# Altium PCB ADXL001.PcbDoc
Units mm, origin at the board's own origin, x right, y up, seen from the top; angles counter-clockwise.
Board outline 20 x 22.95 mm, 2 copper layers (Top Layer, Bottom Layer); 5 components, 5 nets, 22 pads, 5 vias.
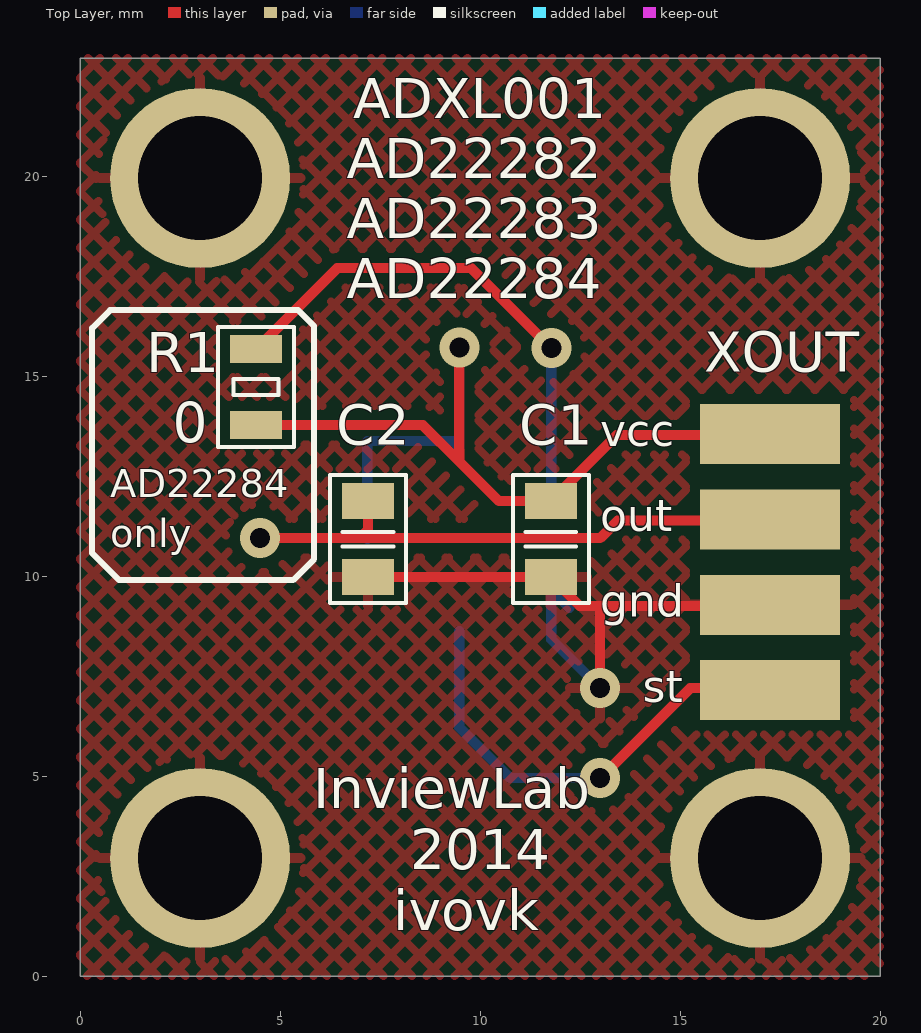
[diagram p0: Top Layer view]
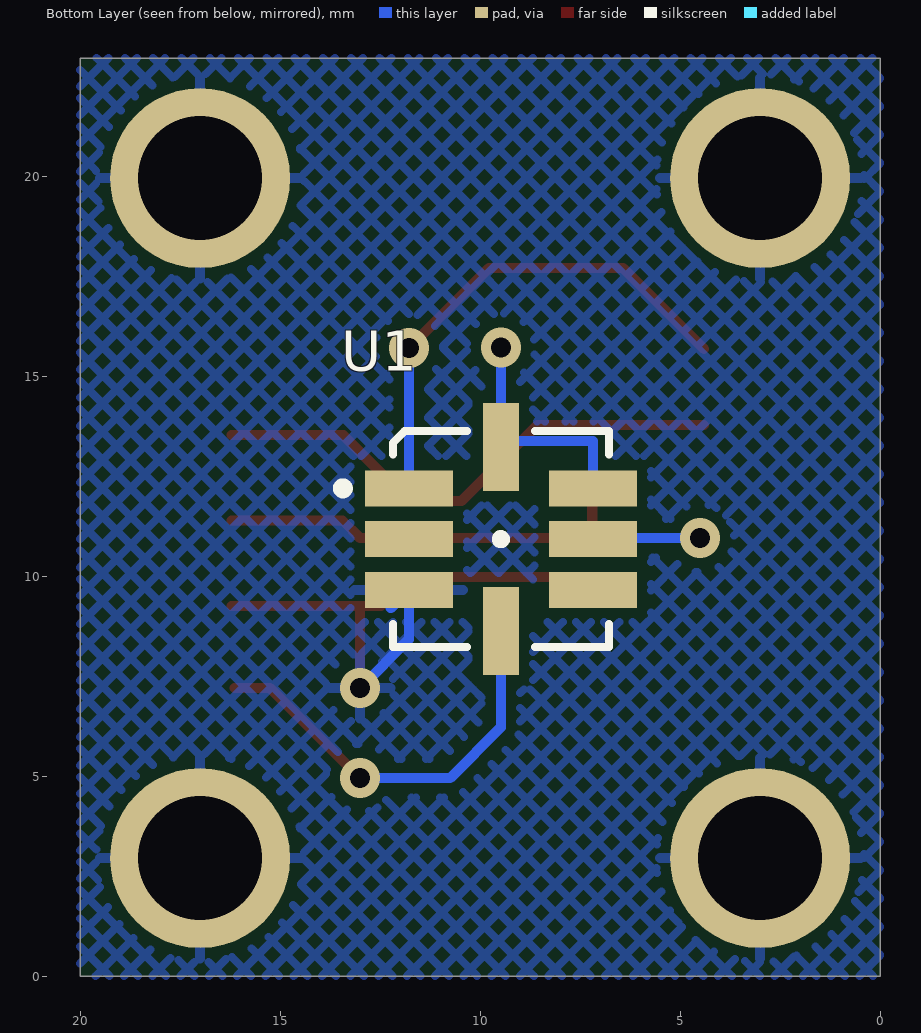
[diagram p1: Bottom Layer view, seen from below]
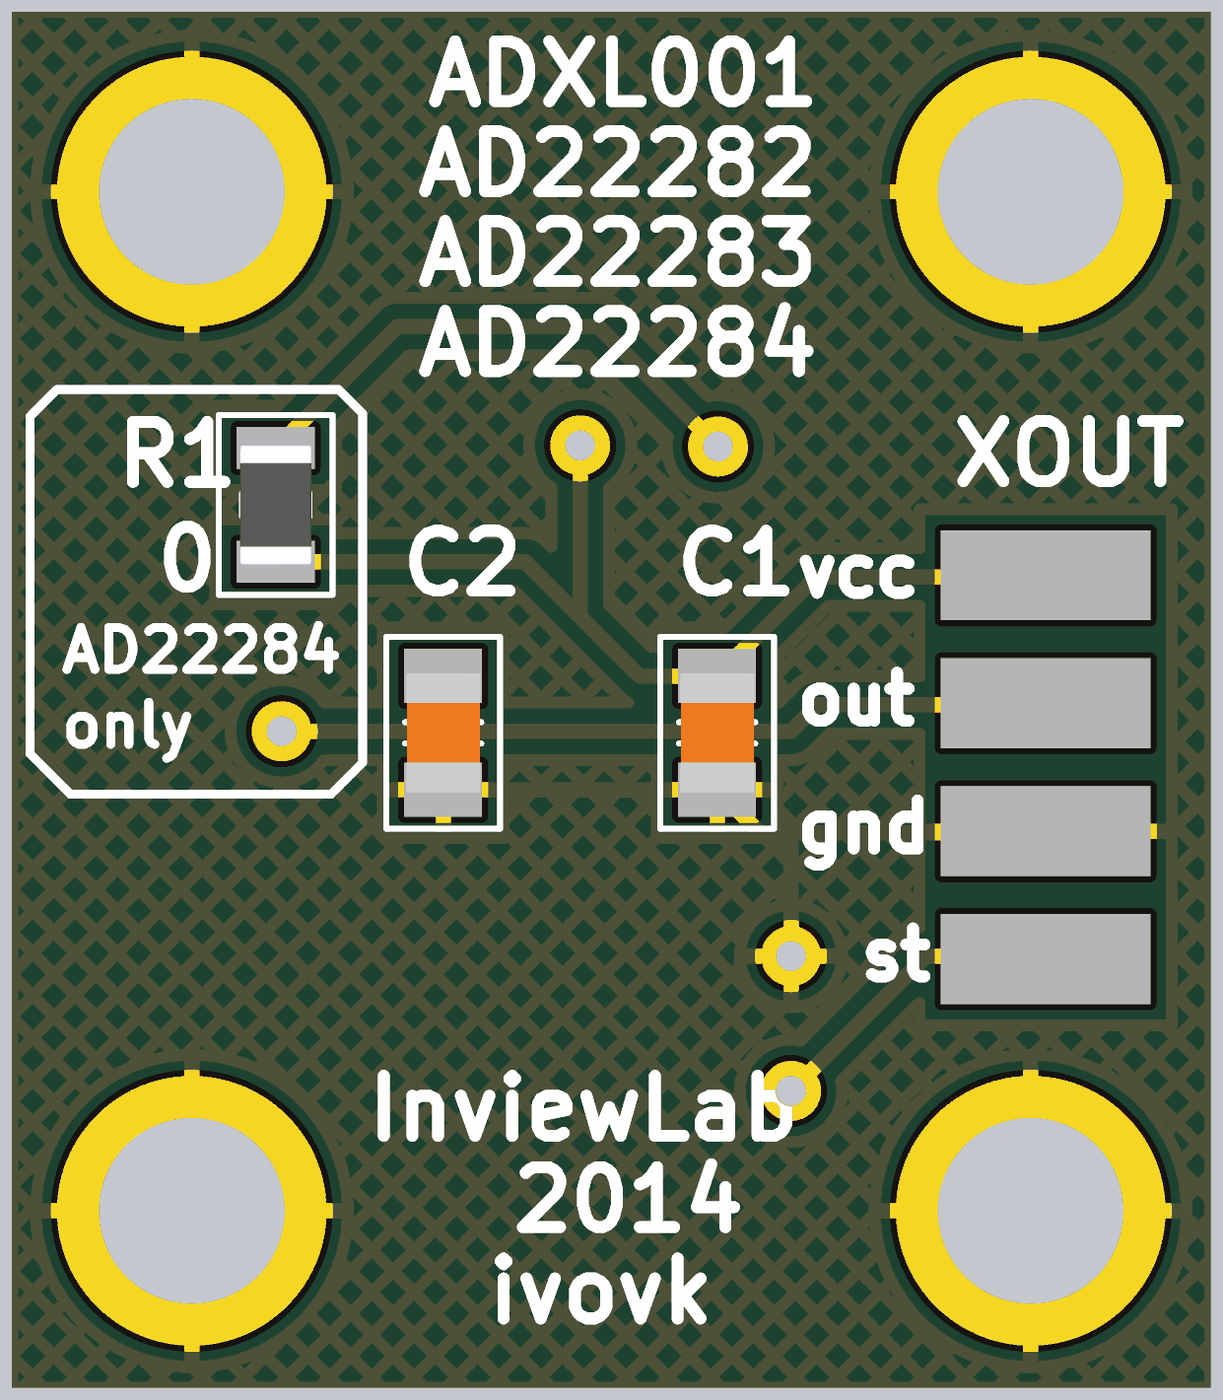
[diagram p2: 3D render of the assembled board from above, using the file's embedded part models]

## Layer stack, top to bottom
Top Solder: solder mask 0.0102, Solder Resist, Dk 3.5
Top Layer: signal copper 0.0356
Dielectric 1: dielectric 0.32, FR-4, Dk 4.8
Bottom Layer: signal copper 0.0356
Bottom Solder: solder mask 0.0102, Solder Resist, Dk 3.5

## Board outline
0,0 0,22.949 20,22.949 20,0

## Design rules (kind name [scope] priority, off if disabled: settings)
Clearance [All] p1: gap=0.254
PolygonConnect [All] p1: connectstyle=Relief reliefconductorwidth=0.254 reliefentries=4 polygonreliefangle="90 Angle" airgapwidth=0.254
RoutingVias [All] p1: holewidth=0.711 width=1.27 viastyle="Through Hole" minholewidth=0.711 minwidth=1.27 maxholewidth=0.711 maxwidth=1.27
SolderMaskExpansion [All] p1: expansion=0.102
UnpouredPolygon [All] p1: allowunpoured=FALSE
Width [All] p1: maxlimit=0.254 minlimit=0.15 preferedwidth=0.2
29 further rules are at their usual default settings.

## Components (designator, comment, footprint, x,y, rotation, side; value= is the part's Value field where it differs from the comment)
C1 "0.1uF" C_0805 11.767,10.922 r90 top
C2 "1nF" C_0805 7.195,10.922 r90 top
R1 "only for ADXL22284" R_0805 4.4,14.724 r90 top
U1 "ADXL001" E-8-1 9.481,10.922 r180 bottom locked
XOUT "X_OUT" 4_pin_plate_conn 17.25,10.949 r0 top (schematic designator CONN1)

## Footprints (in the part's own frame and the unit in brackets; to place one, negate y for a bottom-side part, rotate by r counter-clockwise, add the part's x,y. Pads: shape width x height; smd on the part's side, far side on the other; paste and mask are expansions set on the pad)
4_pin_plate_conn [mm]
  rect 3.5x1.5 smd: 1(0,2.6) 2(0,0.467) 3(0,-1.667) 4(0,-3.8)
C_0805 [mm] "Capacitor Pattern"
  rect 0.9x1.3 smd: 1(-0.95,0) 2(0.95,0)
  silkscreen extent -1.6,-0.95 1.6,0.95, body extent -1,-0.63 1,0.62, height 0.6
E-8-1 [mm] "LCC, 8-Pins, Body 5,03x5,03mmx2,16mm, Pitch 1,27mm, IPC Low Density"
  rect 2.2x0.9 smd: 1(-2.3,1.27) 2(-2.3,0) 3(-2.3,-1.27) 5(2.3,-1.27) 6(2.3,0) 7(2.3,1.27)
  rect 0.9x2.2 smd: 4(0,-2.3) 8(0,2.3)
  silkscreen extent -4.08,-2.7 2.7,2.7, body extent -2.5,-2.51 2.5,2.49, height 1.93
R_0805 [mm] "Resistor Pattern"
  rect 0.7x1.3 smd: 1(-0.95,0) 2(0.95,0)
  silkscreen extent -1.5,-0.95 1.5,0.95, body extent -1,-0.6 1,0.6, height 0.5

## Part data
C1 C2: library part C0805, "Capacitor"
R1: library part R0805, "Resistor"
U1: "Analog devices accelerometer"
XOUT: library part 4_pin_plate_conn

## Free pads (board coordinates)
  round 4.5 hole 3.1: 1(3,2.949) 1(3,19.949) 1(17,2.949) 1(17,19.949)

## Via types
v1: diameter 1, hole 0.5, Top Layer to Bottom Layer, 5 vias

## Nets (pads, with @x,y where several pads share a name; then routed paths per layer and width w, separated by ;. In a path a pad name is that pad's centre, name@x,y a point inside that pad or via, vN(x,y) a via of type N, cw(c..) or ccw(c..) an arc to the next point about the centre after c; other vN are vias at no path point)
GND: C1.1 C2.1 pad.1 U1.3 XOUT.3 | length 15
  Top Layer w0.254: C2.1 C1.1 12.484,9.255 13,9.255 ; v1(13,7.199) 13,9.255 ; XOUT.3@16.212,9.255 13,9.255
  Bottom Layer w0.254: 12.234,9.199 U1.3 11.781,8.418 v1(13,7.199)
NetR1_2: R1.2 U1.1 | length 12.6
  Top Layer w0.254: R1.2 6.425,17.699 9.781,17.699 v1(11.781,15.699)
  Bottom Layer w0.254: U1.1 v1(11.781,15.699)
SELF_TEST: U1.4 XOUT.4 | length 10.5
  Top Layer w0.254: v1(13,4.949) 15.25,7.199 XOUT.4@16.135,7.199
  Bottom Layer w0.254: U1.4 9.481,6.218 10.75,4.949 v1(13,4.949)
VCC_5V: C1.2 R1.1 U1.7 U1.8 XOUT.1 | length 22.2
  Top Layer w0.254: R1.1 8.571,13.774 9.481,12.864 ; v1(9.481,15.718) 9.481,12.864 ; XOUT.1@16.212,13.522 13.417,13.522 C1.2 10.473,11.872 9.481,12.864
  Bottom Layer w0.254: U1.7 7.181,13.38 9.323,13.38 U1.8 v1(9.481,15.718)
X_OUT: C2.2 U1.6 XOUT.2 | length 15.6
  Top Layer w0.254: v1(4.5,10.949) 7,10.949 ; C2.2 7.195,11.144 7,10.949 ; XOUT.2@16.212,11.389 13.44,11.389 13,10.949 7,10.949
  Bottom Layer w0.254: v1(4.5,10.949) 7.154,10.949 U1.6
pads on no net: U1.2 U1.5

## Polygon pours and split planes (outlines as drawn)
GND on Top Layer "GND" (hatched 45Degree grid 0.5 track 0.2, pour order 4): 0,22.949 20,22.949 20,0 0,0
GND on Bottom Layer "GND" (hatched 45Degree grid 0.5 track 0.2, pour order 6): 0,22.949 20,22.949 20,0 0,0

## Silkscreen, mask and mechanical layers (free items; w line width, h text height)
Top Overlay:
  lines w0.15: 0.3,10.574 0.975,9.899 5.325,9.899 5.85,10.424 5.85,16.249 5.45,16.649 0.75,16.649 0.3,16.199 0.3,10.574
  text "ADXL001" at 6.834,21.449 h1
  text "AD22282" at 6.668,19.949 h1
  text "AD22283" at 6.668,18.449 h1
  text "AD22284" at 6.668,16.949 h1
  text "0" at 2.316,13.349 h1
  text "vcc" at 13,13.249 h0.8
  text "AD22284" at 0.75,11.974 h0.7
  text "out" at 13,11.116 h0.8
  text "only" at 0.75,10.724 h0.7
  text "gnd" at 13,8.982 h0.8
  text "st" at 14.066,6.849 h0.8
  text "InviewLab" at 5.835,4.191 h1
  text "2014" at 8.251,2.667 h1
  text "ivovk" at 7.834,1.143 h1
Mechanical 13:
  the board outline again, w0.254